# EAGLE board GasC (EAGLE 7.6.0)
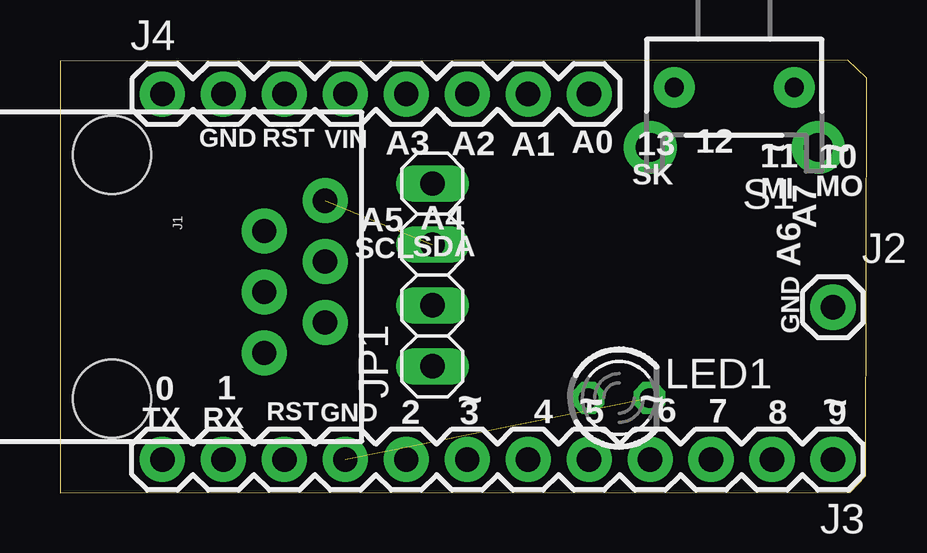
[diagram p0: board, top side]
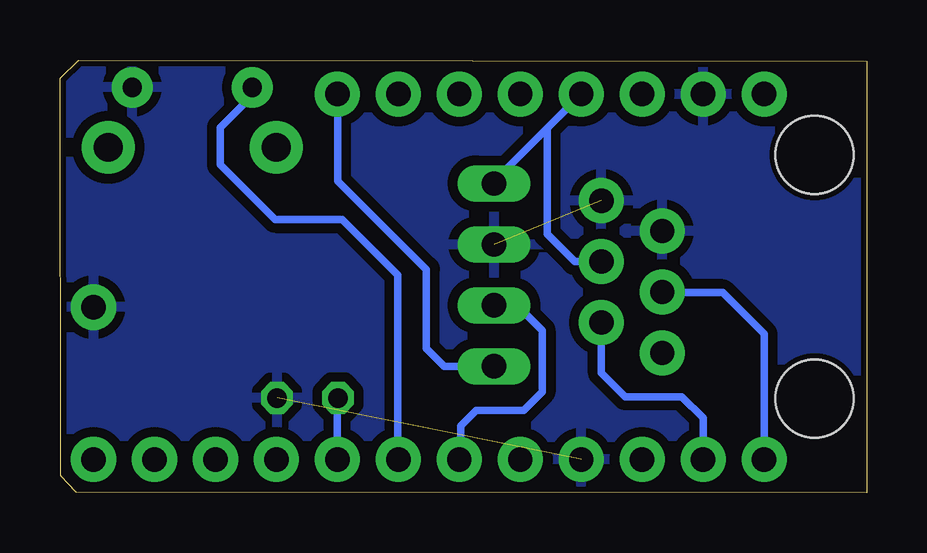
[diagram p1: board, bottom side, seen from below]

Size 33.6 x 18.06 mm. Coordinates in mm from the lower left corner, seen from the top.
Outline: 0,0 32.92,0.02 33.58,0.71 33.6,17.3 32.82,18.06 0,18.01 0,0
Copper layers (1*16): Top 0.035mm / dielectric 1.5mm / Bottom 0.035mm
Design rules "ITEADstudio_DRC *": minimum track width 6mil, minimum drill 12mil, track to track 16mil, track to pad 12mil, pad to pad 6mil, via to via 6mil, smd to smd 0mil, copper to edge 10mil, drill to drill 10mil, minimum pad ring 10mil, minimum via ring 6mil, stop-mask expansion 2mil, vias tented up to drill 100mil, thermal gap 15mil
Net classes: 1 power: width 0.381 mm, clearance 0.254 mm

## Footprints (pad centres in the part's own frame; a part is rotated, then mirrored left to right if it is on the bottom)
RJ11-6 = drill 1.016 pad 1.88: 1 -3.175,8.89; 2 -1.905,6.35; 3 -0.635,8.89; 4 0.635,6.35; 5 1.905,8.89; 6 3.175,6.35 | hole 3.251: -5.08,0; 5.08,0
1X01 = drill 1.016 pad 1.88: 1 0,0
1X12 = drill 1.016 pad 1.88: 1 0,0; 2 2.54,0; 3 5.08,0; 4 7.62,0; 5 10.16,0; 6 12.7,0; 7 15.24,0; 8 17.78,0; 9 20.32,0; 10 22.86,0; 11 25.4,0; 12 27.94,0
1X08_ROUND = drill 1.016 pad 1.88: 1 0,0; 2 2.54,0; 3 5.08,0; 4 7.62,0; 5 10.16,0; 6 12.7,0; 7 15.24,0; 8 17.78,0
1X04 = drill 1.016 long: 1 -3.81,0; 2 -1.27,0; 3 1.27,0; 4 3.81,0
LED3MM = drill 0.813 octagon: A -1.27,0; K 1.27,0
TACTILE-PTH-SIDEEZ = drill 0.8 pad 1.7: 1 -2.5,0; 2 2.5,0 | drill 1.2 pad 2.2: ANCHOR1 -3.5,2.5; ANCHOR2 3.5,2.5

## Placement (x,y rotation side)
J1  RJ11  [RJ11-6]  2.16,9.02 270 top
J2  [1X01]  32.21,7.75 0 top
J3  [1X12]  32.21,1.4 180 top
J4  [1X08_ROUND]  4.27,16.64 0 top
JP1  [1X04]  15.52,9.09 90 top
LED1  [LED3MM]  23.29,3.96 0 top
S1  SWITCH-MOMENTARY-2SIDE_EZ  [TACTILE-PTH-SIDEEZ]  28.09,16.92 180 top

## Library data of the parts
J1 = SparkFun-Connectors; PROD_ID: CONN-08590
J2 J3 = SparkFun-Connectors
J4 = SparkFun-Connectors; PROD_ID: CONN-08437
JP1 = pinhead
LED1 = led
S1 = SparkFun-Electromechanical

## Nets
AGND [power]: J2.1 J3.9 LED1.K S1.1
GND [power]: J1.1 J1.2 J4.2 JP1.3
N$1: J3.6 S1.2
N$2: J3.7 JP1.2
N$3: J3.5 LED1.A
N$4: J1.4 J3.12
N$6: J1.5 J3.11
N$7: J4.1
N$9: J4.5
N$11: J4.6
N$12: J4.7
N$13: J4.8 JP1.1
VIN: J1.3 J4.4 JP1.4

## Tracks (layer width: path | path; a pad name or v marks a point on that pad's centre or on a via)
AGND  (1 unrouted)
  pour Bottom: 3.4,17.83 33.4,17.88 33.45,0.1 0.2,0.18 0.15,17.86
GND  (1 unrouted)
  pour Bottom: 0.18,17.86 33.43,17.86 33.45,0.18 0.2,0.18
N$1
  Bottom 0.305: S1.2 25.59,16.57 26.92,15.24 26.92,13.69 24.64,11.41 21.84,11.41 19.53,9.09 19.53,1.42 J3.6
N$2
  Bottom 0.305: JP1.2 14.55,7.82 13.51,6.78 13.51,4.22 14.27,3.45 16.26,3.45 16.92,2.79 16.92,1.45 J3.7
N$3
  Bottom 0.305: J3.5 22.05,3.94 LED1.A
N$4
  Bottom 0.305: J3.12 4.27,6.63 5.99,8.36 8.48,8.36 J1.4
N$6
  Bottom 0.305: J3.11 6.81,3.12 7.7,4.01 10.06,4.01 11.05,5 J1.5
N$13
  Bottom 0.305: JP1.1 17.6,5.28 18.34,6.02 18.34,9.32 22.02,13 22.02,16.61 J4.8
VIN
  Bottom 0.305: J1.3 12.17,9.65 13.31,10.8 13.31,15.21 | 13.31,15.21 J4.4 | JP1.4 15.52,13 13.31,15.21

## Text on the board
_tsilk: VIN | A3 | A2 | A1 | 13 | 12 | ~ | GND | RST | A0 | 11 | 10 | ~ | A4 | SK | MI | A7 | MO | A5 | A6 | SCL | SDA | GND | 0 | 1 | 6 | TX | RX | RST | GND | 2 | ~ | 3 | 4 | ~ | 5 | ~ | 7 | 8 | ~ | 9